# Altium PCB 7475.pcbdoc
Units mm, origin at the board's own origin, x right, y up, seen from the top; angles counter-clockwise.
Board outline 187.5 x 100 mm, 2 copper layers (Top Layer, Bottom Layer); 44 components, 45 nets, 196 pads, 0 vias.
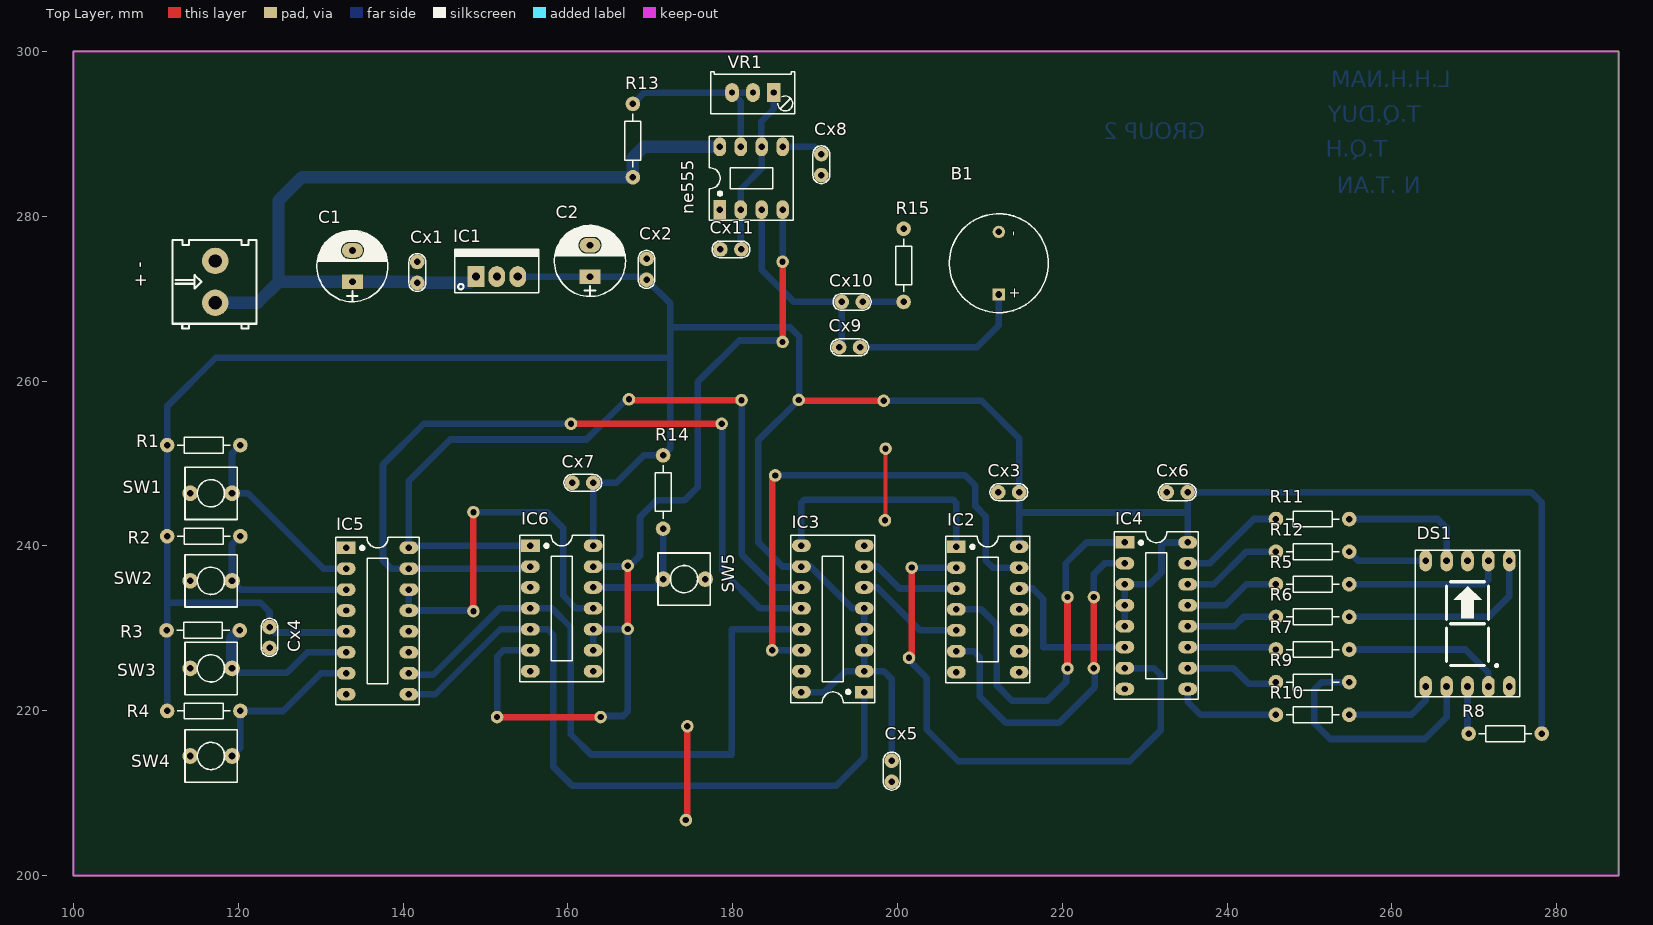
[diagram p0: Top Layer view]
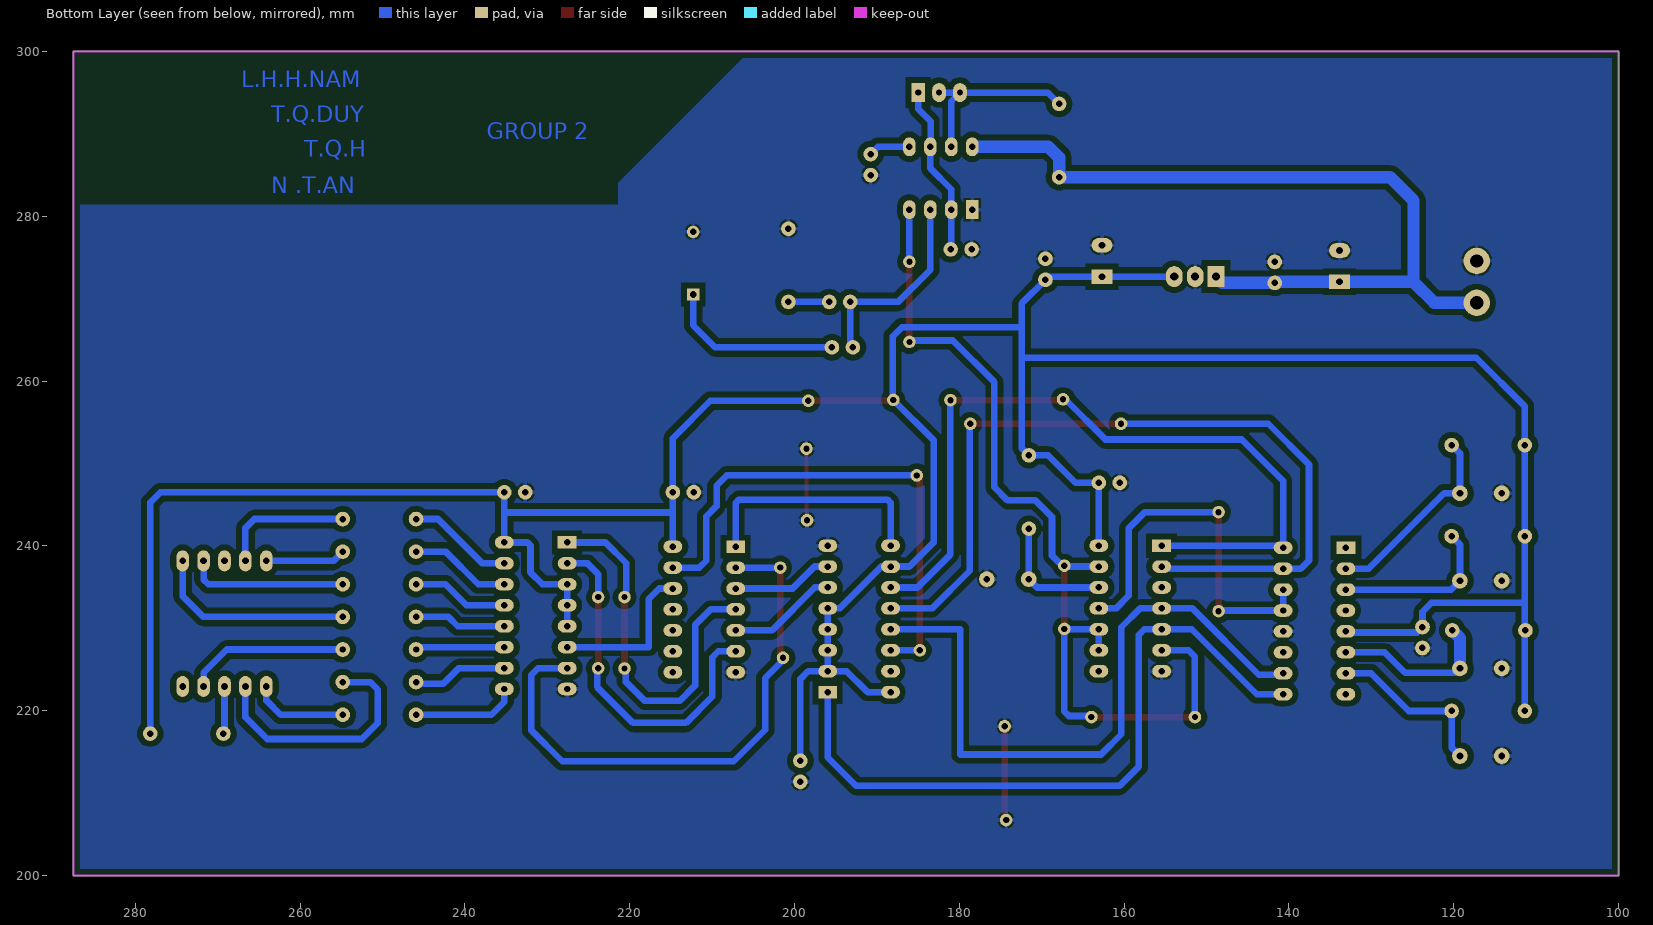
[diagram p1: Bottom Layer view, seen from below]
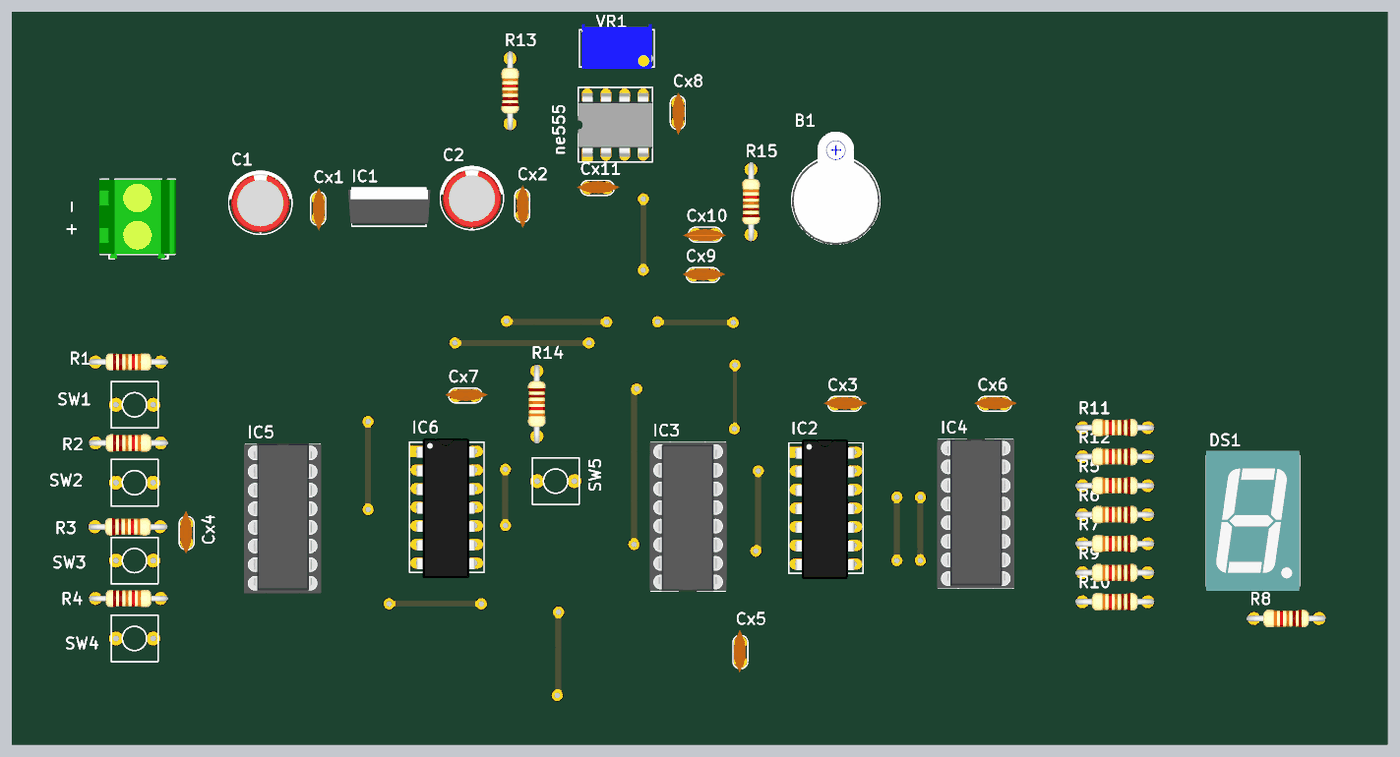
[diagram p2: 3D render of the assembled board from above, using the file's embedded part models]

## Layer stack, top to bottom
Top Solder: solder mask 0.0102, Solder Resist, Dk 3.5
Top Layer: signal copper 0.0356
Dielectric 1: dielectric 0.32, FR-4, Dk 4.8
Bottom Layer: signal copper 0.0356
Bottom Solder: solder mask 0.0102, Solder Resist, Dk 3.5

## Board outline
100,200 100,300 287.5,300 287.5,200

## Design rules (kind name [scope] priority, off if disabled: settings)
Clearance [All] p1: gap=0.7 ignorepadtopadclearanceinfootprint=FALSE
PolygonConnect [All] p1: connectstyle=Relief reliefconductorwidth=0.5 reliefentries=4 polygonreliefangle="90 Angle" airgapwidth=0.254
RoutingVias [All] p1: holewidth=0.711 width=1.27 viastyle="Through Hole" minholewidth=0.711 minwidth=1.27 maxholewidth=0.711 maxwidth=1.27
SolderMaskExpansion [All] p1: expansion=0.102
Width [All] p1: maxlimit=2 minlimit=0.5 preferedwidth=1.5
30 further rules are at their usual default settings.

## Components (designator, comment, footprint, x,y, rotation, side; value= is the part's Value field where it differs from the comment)
"- +" "KF128-2P" "con 2 kf128" 117.221,272.034 r90 top (schematic designator P1)
B1 "Buzzer" Buzzer 212.293,274.295 r90 top
C1 "470/25V" CP1.5/3.4 133.858,272.034 r90 top value=1000uF/16V
C2 "100uF/16V" CP1.5/3.4 162.687,272.669 r90 top value=1000uF/16V
Cx1 "104" CN1 141.732,274.447 r270 top value=33pF
Cx2 "104" CN1 169.545,274.828 r270 top value=33pF
Cx3 "104" CN1 212.217,246.507 r0 top value=33pF
Cx4 "104" CN1 123.8,227.609 r90 top value=33pF
Cx5 "104" CN1 199.288,211.379 r90 top value=33pF
Cx6 "104" CN1 232.664,246.507 r0 top value=33pF
Cx7 "104" CN1 160.528,247.65 r0 top value=33pF
Cx8 "0,01UF" CN1 190.754,287.528 r270 top value=33pF
Cx9 "47UF 35V" CN1 192.913,264.084 r0 top value=33pF
Cx10 "0,047UF" CN1 195.783,269.596 r180 top value=33pF
Cx11 "0,033UF" CN1 178.511,275.971 r0 top value=33pF
DS1 "7SEG S" 7SEGS 264.084,222.936 r0 top value="LED 7S SEG"
IC1 "LM7805" QTO-220 148.844,272.669 r0 top
IC2 "7404" DIP14/W0.3 207.137,239.903 r270 top
IC3 "74147" DIP16/W0.3 195.961,222.25 r90 top
IC4 "7447" DIP16/W0.3 227.584,240.411 r270 top value="7447 , 74247"
IC5 "74LS75" DIP16/W0.3 133.096,239.776 r270 top
IC6 "7400" DIP14/W0.3 155.448,240.03 r270 top
ne555 "ic555" DIP8/W0.3 178.435,280.797 r0 top (schematic designator *1)
R1 "1k" R1/4W 120.269,252.222 r180 top value="R1/4W - 1K"
R2 "1k" R1/4W 120.269,241.173 r180 top value="R1/4W - 1K"
R3 "1k" R1/4W 120.193,229.743 r180 top value="R1/4W - 1K"
R4 "1k" R1/4W 120.269,219.964 r180 top value="R1/4W - 1K"
R5 "220R" R1/4W 245.923,235.339 r0 top value="R1/4W - 1K"
R6 "220R" R1/4W 245.923,231.381 r0 top value="R1/4W - 1K"
R7 "220R" R1/4W 245.923,227.423 r0 top value="R1/4W - 1K"
R8 "330R" R1/4W 269.291,217.221 r0 top value="R1/4W - 1K"
R9 "220R" R1/4W 245.923,223.465 r0 top value="R1/4W - 1K"
R10 "220R" R1/4W 245.923,219.507 r0 top value="R1/4W - 1K"
R11 "220R" R1/4W 245.923,243.256 r0 top value="R1/4W - 1K"
R12 "220R" R1/4W 245.923,239.298 r0 top value="R1/4W - 1K"
R13 "100R" R1/4W 167.894,293.624 r270 top value="R1/4W - 1K"
R14 "1k" R1/4W 171.552,242.087 r90 top value="R1/4W - 1K"
R15 "10R" R1/4W 200.736,278.486 r270 top value="R1/4W - 1K"
SW1 "SW" SW2 114.173,246.38 r0 top value="SW chip 2 pin"
SW2 "SW" SW2 114.173,235.754 r0 top value="SW chip 2 pin"
SW3 "SW" SW2 114.173,225.129 r0 top value="SW chip 2 pin"
SW4 "SW" SW2 114.173,214.503 r0 top value="SW chip 2 pin"
SW5 "SW" SW2 171.577,235.966 r0 top value="SW chip 2 pin"
VR1 "10K" VR1 185,295 r180 top value="VR 10K"

## Footprints (in the part's own frame and the unit in brackets; to place one, negate y for a bottom-side part, rotate by r counter-clockwise, add the part's x,y. Pads: shape width x height; smd on the part's side, far side on the other; paste and mask are expansions set on the pad)
7SEGS [mil] "DIP 10 Leads; Body 12 x 15 mm; Pitch 0.5 mm"
  oval 60x100 hole 32: 1(0,0) 2(100,0) 3(200,0) 4(300,0) 5(400,0) 6(400,600) 7(300,600) 8(200,600) 9(100,600) 10(0,600)
  silkscreen extent -50,-50 450,650, body extent -50,-75 450,675, height 316
Buzzer [mm] "2PIN, 3.5mm pitch, 0.8mm pin width"
  rect 1.5x1.5 hole 0.8: 1(-3.8,0)
  round 1.5 hole 0.8: 2(3.8,0)
  silkscreen extent -6,-6 6,6, body extent -6.08,-6.01 9.37,5.99, height 9.65
CN1 [mil]
  round 70 hole 31: 1(0,0) 2(100,0)
  silkscreen extent -40,-40 141,40, body extent -60,-30 170,37, height 265
"con 2 kf128" [mm]
  round 3.2 hole 1.6 mask+0.102: 1(-2.54,0) 2(2.54,0)
  silkscreen extent -5.68,-5 5.08,5.2, body extent -5.68,-5.16 5.08,5.34, height 14.85
CP1.5/3.4 [mil] "Tu hoa 220->470uF,16V, 470uF/16V,25V"
  rect 70x100 hole 32: 1(0,0)
  oval 70x100 hole 32: 2(150,0)
  silkscreen extent -95,-170 245,170, body extent -85,-157 230,157, height 446
DIP8/W0.3 [mil] "8 PIN, W 300mil, Pin to pin 100mil"
  rect 60x90 hole 31: 1(0,0)
  oval 60x90 hole 31: 2(100,0) 3(200,0) 4(300,0) 5(300,300) 6(200,300) 7(100,300) 8(0,300)
  silkscreen extent -50,-50 350,350, body extent -50,-40 350,336, height 201
DIP14/W0.3 [mil] "14PIN, W 300mil, Pin to pin 100mil"
  rect 60x90 hole 31: 1(0,0)
  oval 60x90 hole 31: 2(100,0) 3(200,0) 4(300,0) 5(400,0) 6(500,0) 7(600,0) 8(600,300) 9(500,300) 10(400,300) 11(300,300) 12(200,300) 13(100,300) 14(0,300)
  silkscreen extent -50,-50 650,350, body extent -70,-12 680,302, height 145
DIP16/W0.3 [mil] "16 PIN, W 300mil, Pin to pin 100mil"
  rect 60x90 hole 31: 1(0,0)
  oval 60x90 hole 31: 2(100,0) 3(200,0) 4(300,0) 5(400,0) 6(500,0) 7(600,0) 8(700,0) 9(700,300) 10(600,300) 11(500,300) 12(400,300) 13(300,300) 14(200,300) 15(100,300) 16(0,300)
  silkscreen extent -50,-50 750,350, body extent -52,-57 752,356, height 299
QTO-220 [mil] "TO-220 - 1-2-3"
  rect 80x100 hole 39: 1(0,0)
  oval 80x100 hole 39: 2(100,0) 3(200,0)
  silkscreen extent -100,-76 300,130, body extent -119,-64 322,121, height 755
R1/4W [mil] "R 1/4W, 2 Pin, 350mil"
  round 70 hole 31: 1(0,0) 2(350,0)
  silkscreen extent 48,-38 302,38, body extent -40,-47 386,47, height 111
SW2 [mm] "SW button 2pin, 250x 250 mil"
  round 1.905 hole 0.8: 1(0,0) 2(5.08,0)
  silkscreen extent -0.64,-3.17 5.71,3.17
VR1 [mil] "Variable Resistor"
  rect 65x90 hole 30: 1(0,0)
  oval 65x90 hole 30: 2(100,0) 3(200,0)
  silkscreen extent -100,-100 301,100, body extent -88,-130 288,110, height 455

## Part data
"- +": library part "Con 2 kf128", "C?m", Chung_Loai=C?m, Don_Vi=Con, Ma_Hang=MH000982, So_Chan=2, Ten_Linh_Kien="CON 2 KF128-2P 5.08MM"
C1 C2: library part CP4, "Cap 1000uF/16V - 220uF/50V", Description 1="2200uF-3300uF/6,3V - 1000uF-2200uF/10V", Description 2="1000uF/16V - 470uF => 1000uF/25V - 100uF/100V", Description 3=330uF>470uF/35V_220uF>470uF/50V_10uF>22uF/250V, Description 4="220uF => 330uF/63V - 10uF =>33uF/160 - 200V", Description 5="4,7uF>10uF/250V_3,3uF>10uF/400V - 2,2uF>4,7uF/450V"
Cx1 Cx2 Cx3 Cx4 Cx5 Cx6 Cx7 Cx8 Cx9 Cx10 Cx11: library part CN0, "Cremic For Xtal 1pF => 100pF"
DS1: library part LED7S, "Single 7 Seg Dipslay"
IC1: library part LM78xx, "On ap +, from + 5 to + 24VDC", =LM7808
IC2: "Hex Inverter", Code_IPC=SOIC127P600-14, ComponentLink1Description="Manufacturer Link", ComponentLink1URL=http://www.national.com/, ComponentLink2Description=Datasheet, ComponentLink2URL=http://www.fairchildsemi.com/ds/74/74F04.pdf
IC3: "10-Line to 4-Line Priority Encoder", Copyright by=VanDungEvn@Gmail.com
IC4: "BCD to 7-Segment Decoder/Driver"
IC5: library part 74147, "10-Line to 4-Line Priority Encoder", Copyright by=VanDungEvn@Gmail.com
IC6: "Quad 2-Input NAND Gate", Copyright by=VanDungEvn@Gmail.com
R1 R2 R3 R4 R5 R6 R7 R8 R9 R10 R11 R12 R13 R14 R15: library part R1/4W, "Resistor 1/4W"
SW1 SW2 SW3 SW4 SW5: library part SW2, "Switch button 2 pin"
VR1: library part VR1, "Var Resistor"

## Free pads (board coordinates)
  round 1.524 hole 0.762: 2(186.055,274.472) 3(186.055,264.744) 4(167.259,237.592) 5(167.259,229.921) 6(148.539,244.094) 7(148.539,232.08) 8(151.409,219.227) 9(163.982,219.227) 11(178.664,254.813) 12(181.077,257.683) 13(167.411,257.785) 14(160.376,254.813) 15(220.624,233.782) 16(223.825,233.782) 17(220.624,225.12) 18(223.825,225.146) 19(185.166,248.539) 21(201.727,237.363) 22(201.397,226.416) 23(184.785,227.33) 24(198.323,257.607) 25(188.011,257.708) 26(174.498,218.11) 27(174.32,206.731) 28(198.552,251.79) 29(198.476,243.103)

## Nets (pads, with @x,y where several pads share a name; then routed paths per layer and width w, separated by ;. In a path a pad name is that pad's centre, name@x,y a point inside that pad or via, vN(x,y) a via of type N, cw(c..) or ccw(c..) an arc to the next point about the centre after c; other vN are vias at no path point)
5V: C2.1 Cx2.2 Cx3.2 Cx4.2 Cx5.2 Cx6.2 Cx7.2 IC1.3 IC2.14 IC3.2 IC3.3 IC3.4 IC3.5 IC3.10 IC3.16 IC4.3 IC4.4 IC4.5 IC4.16 IC5.5 IC6.14 pad.24 pad.25 R1.2 R2.2 R3.2 R4.2 R8.2 R14.2 | length 427
  Top Layer w0.8: pad.25@188.239,257.607 pad.24
  Bottom Layer w0.8: R4.2 111.379,233.096 ; IC5.5 132.969,229.489 124.46,229.489 Cx4.2 123.8,232.004 122.707,233.096 111.379,233.096 ; IC1.3 C2.1 169.164,272.669 Cx2.2 172.441,269.392 172.441,266.37 ; IC6.14 Cx7.2 165.887,247.65 169.215,250.977 R14.2 172.441,251.866 172.441,262.814 ; IC3.16@188.214,222.123 IC3.16 191.135,222.25 193.675,224.79 IC3.2 ; pad.24 210.21,257.607 214.757,253.06 Cx3.2 214.757,244.043 ; Cx5.2@199.568,213.97 199.288,214.249 199.288,223.85 198.349,224.79 IC3.2 ; IC2.14 214.757,244.043 ; IC4.5 IC4.4 IC4.3 230.581,235.331 232.029,236.779 232.029,240.03 232.41,240.411 IC4.16 235.204,243.789 ; R8.2 278.181,245.262 276.936,246.507 Cx6.2 235.204,243.789 ; 111.379,233.096 R2.2 R1.2 111.379,256.921 117.272,262.814 172.441,262.814 ; 172.441,262.814 172.441,266.37 ; 172.441,266.37 172.593,266.522 186.969,266.522 188.087,265.405 188.087,257.785 pad.25 183.083,252.781 183.083,240.462 186.055,237.49 IC3.10 189.459,237.49 194.539,232.41 IC3.5 IC3.4 IC3.3 IC3.2 ; 214.757,244.043 234.95,244.043 235.204,243.789
8: IC5.13 IC5.14 IC6.11 pad.6 pad.7 | length 46.4
  Top Layer w0.8: pad.7 pad.6
  Bottom Layer w0.8: IC5.14 IC5.13 pad.7@148.361,232.156 ; pad.6 157.48,244.094 159.461,242.113 159.461,233.934 160.985,232.41 IC6.11
10: IC3.13 IC5.10 IC6.4 | length 81.2
  Bottom Layer w0.8: IC5.10 140.894,224.358 143.662,224.358 151.714,232.41 IC6.4 158.064,232.41 160.35,230.124 160.35,217.145 162.814,214.681 179.883,214.681 179.883,229.87 IC3.13
12V: "- +.1" C1.1 Cx1.2 IC1.1 ne555.8 R13.2 | length 100.5
  Bottom Layer w1.5: 117.221,269.494 122.352,269.494 124.892,272.034 ; IC1.1 148.082,271.907 Cx1.2 141.605,272.034 C1.1 124.892,272.034 ; ne555.8 169.189,288.417 167.894,287.122 R13.2 127.737,284.734 124.892,281.889 124.892,272.034
15: 
A: IC3.12 IC5.15 IC6.2 pad.11 pad.14 | length 102.7
  Top Layer w0.8: pad.14 pad.11
  Bottom Layer w0.8: IC6.2 155.194,237.236 IC5.15 138.557,237.236 137.566,238.227 137.566,249.86 142.519,254.813 pad.14 ; pad.11@178.74,255.041 178.74,236.982 183.312,232.41 IC3.12
D1: IC5.2 R1.1 SW1.2 | length 23.9
  Bottom Layer w0.8: R1.1 119.253,251.206 SW1.2 121.183,246.38 130.327,237.236 IC5.2
D2: IC5.3 R2.1 SW2.2 | length 20.1
  Bottom Layer w0.8: R2.1 119.253,240.157 SW2.2 120.311,234.696 IC5.3
D3: IC5.6 R3.1 SW3.2 | length 20.1
  Bottom Layer w0.8: SW3.2 119.769,224.612 125.908,224.612 128.372,227.076 IC5.6
  Bottom Layer w1.5: SW3.2 119.253,228.803 R3.1
D4: IC5.7 R4.1 SW4.2 | length 20.6
  Bottom Layer w0.8: SW4.2 120.269,215.519 R4.1 125.476,219.964 130.048,224.536 IC5.7
GND: "- +.2" B1.2 C1.2 C2.2 Cx1.1 Cx2.1 Cx3.1 Cx4.1 Cx5.1 Cx6.1 Cx7.1 Cx8.2 Cx11.1 IC1.2 IC2.7 IC3.8 IC4.8 IC5.12 IC6.7 ne555.1 pad.26 pad.27 pad.28 pad.29 R15.1 SW1.1 SW2.1 SW3.1 SW4.1 SW5.2 | length 20.2
  Top Layer w0.5: pad.29 198.552,243.18 pad.28
  Top Layer w0.8: pad.27 174.498,206.908 pad.26
Net*1_2: Cx11.2 ne555.2 ne555.6 VR1.1 | length 20.8
  Bottom Layer w0.8: Cx11.2 180.975,276.047 ne555.2 180.975,283.261 183.515,285.801 ne555.6 183.464,288.468 183.464,291.49 185,293.026 VR1.1
Net*1_3: Cx9.1 Cx10.2 ne555.3 | length 24.3
  Bottom Layer w0.8: ne555.3 183.515,273.507 187.427,269.596 Cx10.2 193.243,264.414 Cx9.1
Net*1_4: IC6.6 IC6.9 IC6.10 IC6.13 ne555.4 pad.2 pad.3 pad.4 pad.5 pad.8 pad.9 | length 112.9
  Top Layer w0.8: pad.8 pad.9 ; pad.5 pad.4 ; pad.3 pad.2
  Bottom Layer w0.8: pad.8 151.409,226.543 152.197,227.33 IC6.6 ; IC6.9 IC6.10 pad.5@167.259,229.87 ; IC6.13 167.437,237.49 168.758,238.811 168.758,243.51 170.764,245.516 174.142,245.516 175.743,247.117 175.743,259.867 180.797,264.922 pad.3@185.826,264.922 ; pad.9@163.601,219.354 166.7,219.354 167.259,219.913 pad.5@167.259,229.87 ; pad.5 pad.5@167.259,229.87 ; pad.2 ne555.4
Net*1_5: Cx8.1 ne555.5 | length 5.1
  Bottom Layer w0.8: ne555.5 189.865,288.417 Cx8.1
Net*1_7: ne555.7 R13.1 VR1.2 VR1.3 | length 22.2
  Bottom Layer w0.8: R13.1 169.27,295 VR1.3 ; ne555.7 180.975,293.945 VR1.3 ; VR1.2 VR1.3
NetB1_1: B1.1 Cx9.2 | length 21.7
  Bottom Layer w0.8: Cx9.2 209.626,264.084 212.293,266.751 B1.1
NetCx10_1: Cx10.1 R15.2 | length 5
  Bottom Layer w0.8: Cx10.1 R15.2
NetDS1_1: DS1.1 R10.2 | length 11.7
  Bottom Layer w0.8: R10.2 262.357,219.507 264.084,221.234 DS1.1
NetDS1_2: DS1.2 R9.2 | length 30.4
  Bottom Layer w0.8: R9.2 251.481,223.465 250.571,222.555 250.571,218.491 252.501,216.56 263.982,216.56 266.624,219.202 DS1.2
NetDS1_3: DS1.3 R8.1 | length 5.8
  Bottom Layer w0.8: DS1.3 269.164,217.348 R8.1
NetDS1_4: DS1.4 R7.2 | length 19.7
  Bottom Layer w0.8: R7.2 268.893,227.423 271.704,224.612 DS1.4
NetDS1_6: DS1.6 R6.2 | length 24.7
  Bottom Layer w0.8: R6.2 271.716,231.381 274.244,233.909 DS1.6
NetDS1_7: DS1.7 R5.2 | length 19.4
  Bottom Layer w0.8: R5.2 271.128,235.339 271.704,235.915 DS1.7
NetDS1_9: DS1.9 R11.2 | length 16.3
  Bottom Layer w0.8: R11.2 265.532,243.256 266.624,242.164 DS1.9
NetDS1_10: DS1.10 R12.2 | length 9.7
  Bottom Layer w0.8: R12.2 255.935,238.176 DS1.10
NetIC2_1: IC2.1 IC3.9 | length 29.6
  Bottom Layer w0.8: IC3.9 188.341,245.237 188.722,245.618 206.731,245.618 207.137,245.212 IC2.1
NetIC2_2: IC2.2 IC4.7 pad.21 pad.22 | length 68.7
  Top Layer w0.8: pad.22@201.727,226.593 pad.21
  Bottom Layer w0.8: pad.22@201.193,226.314 203.556,223.952 203.556,217.678 207.366,213.868 228.168,213.868 231.953,217.653 231.953,224.307 231.089,225.171 IC4.7 ; pad.21 IC2.2
NetIC2_3: IC2.3 IC3.7 | length 12.3
  Bottom Layer w0.8: IC3.7 197.561,237.49 200.228,234.823 IC2.3
NetIC2_4: IC2.4 IC4.1 pad.15 pad.17 | length 46.1
  Top Layer w0.8: pad.17 pad.15
  Bottom Layer w0.8: IC2.4 210.185,232.283 212.065,230.403 212.065,223.037 213.919,221.183 218.135,221.183 220.497,223.545 220.497,225.247 pad.17@220.548,225.298 ; pad.15 220.421,233.985 220.421,237.896 222.936,240.411 IC4.1
NetIC2_5: IC2.5 IC3.6 | length 13.4
  Bottom Layer w0.8: IC3.6 195.986,234.975 197.51,234.975 202.743,229.743 IC2.5
NetIC2_6: IC2.6 IC4.2 pad.16 pad.18 | length 43.1
  Top Layer w0.8: pad.18 pad.16
  Bottom Layer w0.8: IC2.6 209.245,227.203 209.956,226.492 209.956,221.742 213.182,218.516 219.583,218.516 223.952,222.885 pad.18@223.952,225.222 ; pad.16 223.825,236.576 225.12,237.871 IC4.2
NetIC2_12: IC2.12 IC4.6 | length 19.2
  Bottom Layer w0.8: IC2.12 216.408,234.823 217.703,233.528 217.703,227.711 IC4.6
NetIC2_13: IC2.13 IC3.14 pad.19 pad.23 | length 63.7
  Top Layer w0.8: pad.23 pad.19@184.785,248.666
  Bottom Layer w0.8: pad.23 IC3.14 ; pad.19 208.153,248.59 209.448,247.294 209.448,244.831 210.718,243.561 210.718,238.201 211.557,237.363 IC2.13
NetIC3_1: IC3.1 IC5.9 IC6.5 | length 85.1
  Bottom Layer w0.8: IC5.9 143.916,221.996 151.79,229.87 IC6.5 157.556,229.87 158.217,229.21 158.217,213.233 160.579,210.871 192.507,210.871 195.961,214.325 IC3.1
NetIC3_11: IC3.11 IC5.16 IC6.1 pad.12 pad.13 | length 95.4
  Top Layer w0.8: pad.13@167.107,257.683 pad.12
  Bottom Layer w0.8: IC6.1 140.97,240.03 IC5.16 140.716,247.904 145.72,252.908 162.281,252.908 167.157,257.785 pad.13 ; pad.12 181.077,238.963 185.09,234.95 IC3.11
NetIC4_9: IC4.9 R10.1 | length 12.9
  Bottom Layer w0.8: IC4.9 235.204,221.082 236.779,219.507 R10.1
NetIC4_10: IC4.10 R9.1 | length 11.6
  Bottom Layer w0.8: IC4.10 240.716,225.171 242.595,223.291 245.749,223.291 R9.1
NetIC4_11: IC4.11 R7.1 | length 10.8
  Bottom Layer w0.8: IC4.11 245.635,227.711 R7.1
NetIC4_12: IC4.12 R6.1 | length 11.2
  Bottom Layer w0.8: IC4.12 240.868,230.251 241.998,231.381 R6.1
NetIC4_13: IC4.13 R5.1 | length 11.8
  Bottom Layer w0.8: IC4.13 239.801,232.791 242.35,235.339 R5.1
NetIC4_14: IC4.14 R12.1 | length 12.4
  Bottom Layer w0.8: IC4.14 238.379,235.331 242.346,239.298 R12.1
NetIC4_15: IC4.15 R11.1 | length 12.9
  Bottom Layer w0.8: IC4.15 237.871,237.871 243.256,243.256 R11.1
NetIC6_12: IC6.12 R14.1 SW5.1 | length 15
  Bottom Layer w0.8: IC6.12 170.561,234.95 SW5.1 R14.1@171.577,242.062
VCC: 
pads on no net: DS1.5 DS1.8 IC2.8 IC2.9 IC2.10 IC2.11 IC3.15 IC5.1 IC5.4 IC5.8 IC5.11 IC6.3 IC6.8

## Polygon pours and split planes (outlines as drawn)
GND on Bottom Layer "Top Layer-No Net" (solid, pour order 4): 100,200 100.406,200.406 287.604,200.406 287.604,280.797 287.02,281.381 221.386,281.381 221.386,284.049 205.435,300 205.155,299.72 99.619,299.72 99.619,200.381 100.203,199.796

## Keep-outs
Keep-Out Layer:
  the board outline again, w0.254

## Other copper
Bottom Layer:
  text "L.H.H.NAM" at 267.157,295.631 h2
  text "T.Q.DUY" at 263.492,291.414 h2
  text "GROUP 2" at 237.363,289.306 h2
  text "T.Q.H" at 259.493,287.198 h2
  text "N .T.AN" at 263.492,282.778 h2

## Text inside footprints (layer, text, board x,y; h text height)
B1: Top Overlay "-" at 214.593,277.545 h1.3 r90; Top Overlay "+" at 214.743,269.895 h1.3 r90